# Altium PCB 51单片机24.PcbDoc
Units mil, origin at the board's own origin, x right, y up, seen from the top; angles counter-clockwise.
Board outline 5130.13 x 3948.04 mil, 2 copper layers (Top Layer, Bottom Layer); 91 components, 89 nets, 378 pads, 4 vias.
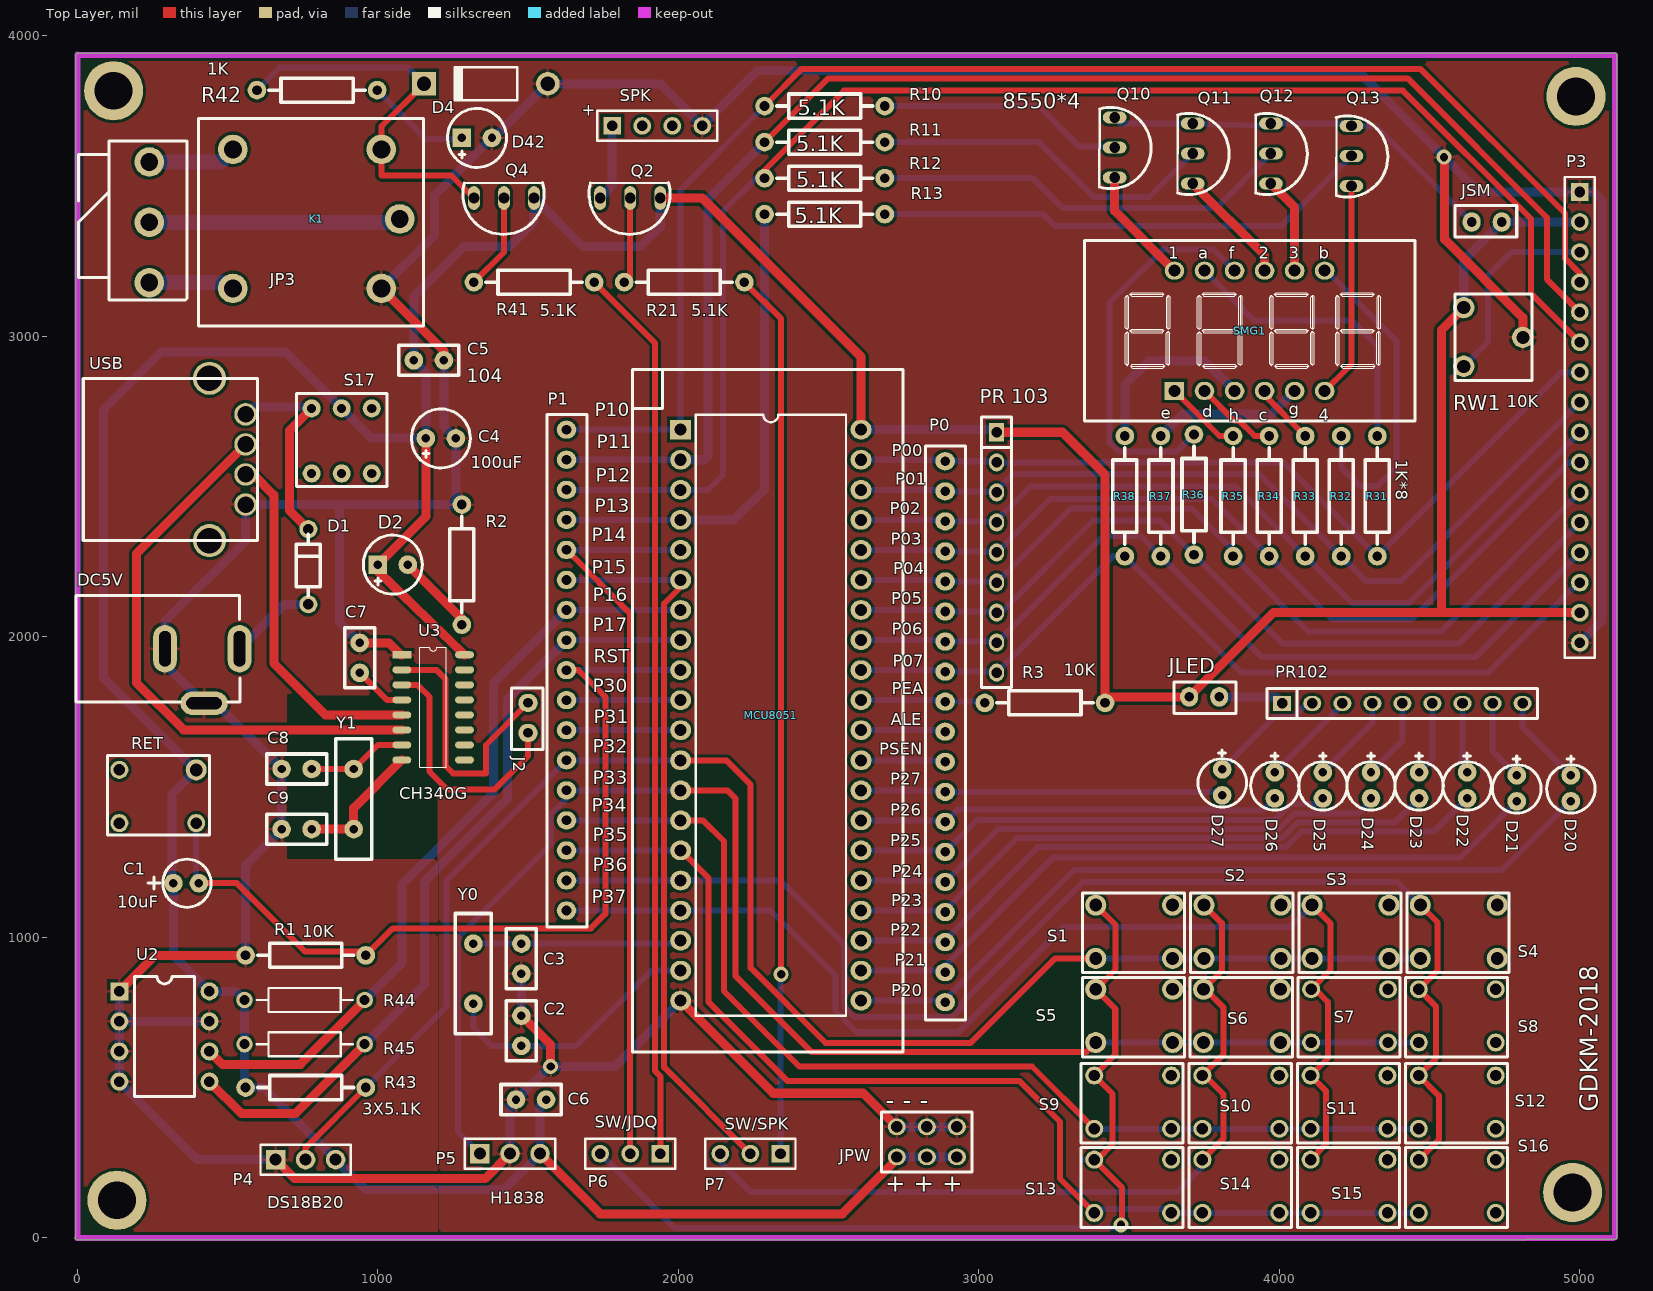
[diagram p0: Top Layer view]
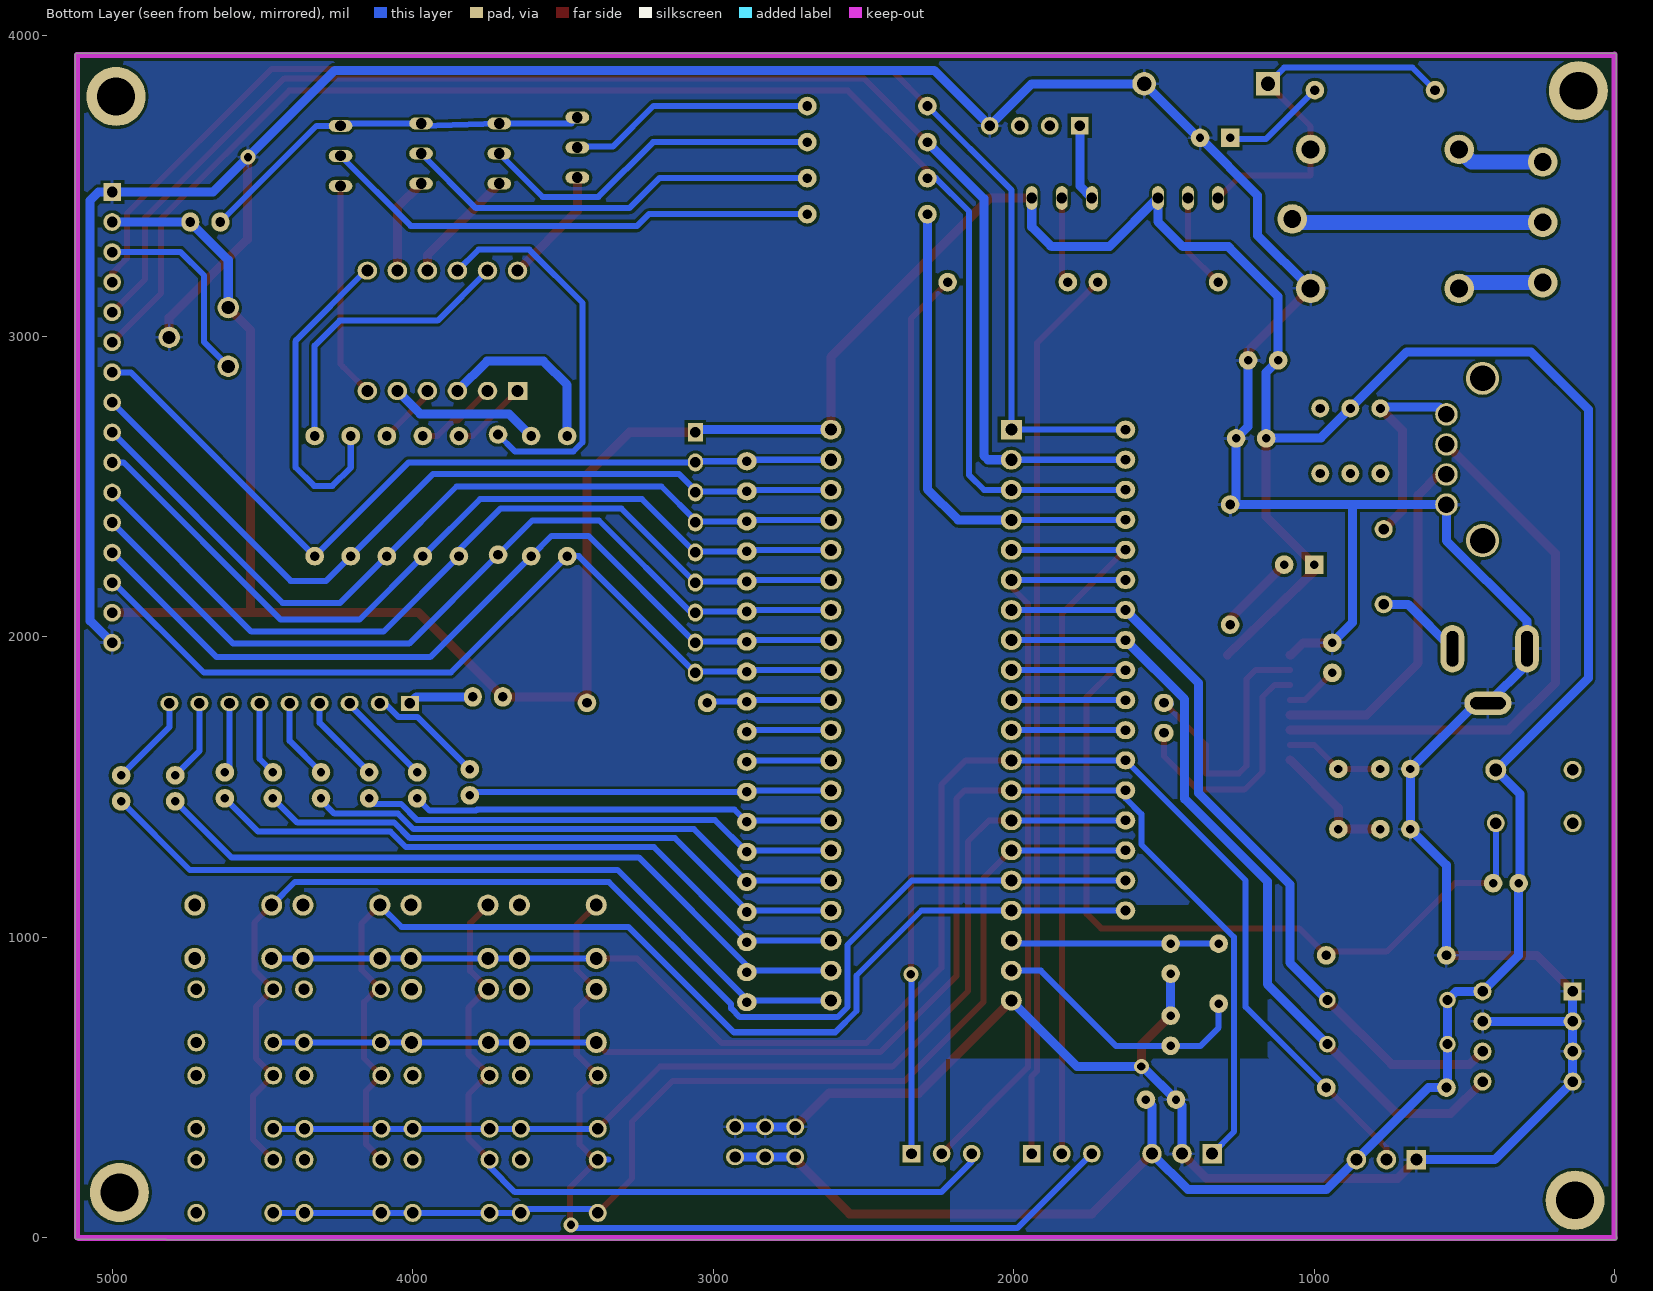
[diagram p1: Bottom Layer view, seen from below]

## Layer stack, top to bottom
Top Solder: solder mask 0.4, Solder Resist, Dk 3.5
Top Layer: signal copper 1.4
Dielectric1: dielectric 12.6, FR-4, Dk 4.8
Bottom Layer: signal copper 1.4
Bottom Solder: solder mask 0.4, Solder Resist, Dk 3.5

## Board outline
-2,-6.01 cw(c-2,-1) -5.02,3.01 -5.02,3937.01 cw(c0,3937.01) 0,3942.02 5118.11,3942.02 cw(c5118.11,3937.01) 5123.13,3937.01 5123.13,0 cw(c5118.11,0) 5118.11,-5.01 4821.01,-5.01 cw(c4818,-1) 4818,-6.01

## Design rules (kind name [scope] priority, off if disabled: settings)
Clearance [All] p1: gap=10 ignorepadtopadclearanceinfootprint=FALSE except(0: Arc-Hole Track-Hole SMDPad-Hole THPad-Hole Via-Hole Fill-Hole Poly-Hole Region-Hole Text-Hole)
FabricationTestPointUsage TestPointUsage [All] p1: valid=0 allowmultiple=FALSE
FabricationTestpoint Testpoint [All] p1: side=3 testpointundercomponent=TRUE minsize=40 maxsize=100 preferedsize=60 minholesize=0 maxholesize=40 preferedholesize=32 testpointgrid=1 allowsidetop=TRUE allowsidebottom=TRUE usegrid=TRUE gridtolerance=0.01
HoleSize [All] p1: absolutevalues=TRUE maxlimit=1000 minlimit=1 maxpercent=80.000 minpercent=20.000
PolygonConnect [All] p1: connectstyle=Relief reliefconductorwidth=10 reliefentries=4 polygonreliefangle="90 Angle" airgapwidth=10
RoutingVias PPP [InNetClass('PPP')] p1: holewidth=40 width=70 viastyle="Through Hole" minholewidth=40 minwidth=70 maxholewidth=40 maxwidth=70
RoutingVias [All] p2: holewidth=35 width=65 viastyle="Through Hole" minholewidth=35 minwidth=65 maxholewidth=35 maxwidth=65
SilkToSilkClearance [All] p1: silktosilkclearance=0
SilkToSolderMaskClearance SilkscreenOverComponentPads [IsPad] p1: minsilkscreentomaskgap=0 clearancetoexposedcopper=TRUE
SolderMaskExpansion [All] p1: expansion=4
Width power [InNetClass('power')] p1: maxlimit=30 minlimit=30 preferedwidth=30
Width JP3 [InNetClass('JP3')] p2: maxlimit=50 minlimit=50 preferedwidth=50
Width D10mil [InNetClass('D10mill')] p3: maxlimit=10 minlimit=10 preferedwidth=10
Width Width_20mil [All] p4: maxlimit=50 minlimit=20 preferedwidth=20 minimp=50.000000 maximp=50.000000 favimp=50.000000
25 further rules are at their usual default settings.

## Components (designator, comment, footprint, x,y, rotation, side; value= is the part's Value field where it differs from the comment)
C1 "10u" C2 320,1180 r0 top
C2 "Cap" RAD-0.1 1478,739 r270 top
C3 "Cap" RAD-0.1 1478,879 r90 top
C4 "100uf" C4 1160,2660 r0 top
C5 "104" RAD-0.1 1120,2920 r0 top
C6 "Cap" RAD-0.1 1460,460 r0 top
C7 "104" RAD-0.1 940,1880 r90 top
C8 "22P" RAD-0.1 780,1560 r180 top
C9 "22p" RAD-0.1 780,1360 r180 top
D1 "1N5918" 4148 760,2200 r90 top
D2 "LED0" LED2 1000,2240 r0 top
D4 "4148" DO-41 1360,3840 r180 top
D20 "LED0" LED8 4970,1539 r270 top
D21 "LED0" LED8 4790,1539 r270 top
D22 "LED0" LED8 4625,1549 r270 top
D23 "LED0" LED8 4465,1549 r270 top
D24 "LED0" LED8 4305,1549 r270 top
D25 "LED0" LED8 4145,1549 r270 top
D26 "LED0" LED8 3985,1549 r270 top
D27 "LED0" LED8 3810,1559 r270 top
D42 "LED0" LED2 1280,3660 r0 top
DC5V "POWER" DC5V-3 540,1960 r270 top
J2 "JJ" j2 1500,1780 r0 top
JLED "JJ" j2 3700,1800 r90 top
JP3 "JP3" JP3 240,3580 r270 top
JPW "JPW" SIP 2802,319 r0 top
JSM "JJ" j2 4740,3380 r270 top
K1 "JDQ" JDQ 518,3159 r0 top
MCU8051 "U1" S52 2008,2689 r0 top locked
P0 "P2" j19 2888,2584 r0 top
P1 "Header 17" J17 1628,2689 r0 top
P3 "Header 16" HDR1X16 5000,3480 r270 top
P4 "DS18B20" HDR1X3#1 660,260 r0 top
P5 "H1838" HDR1X3#1 1340,280 r0 top
P6 "SW/JDQ" HDR1X3#2 1940,280 r180 top
P7 "SW/SPK" HDR1X3#2 2340,280 r180 top
PR102 "1K" SIP-9 4010,1779 r0 top locked
"PR 103" "10K" SIP-9 3060,2680 r270 top (schematic designator PR103)
Q2 "S8550" sanjiguan 1940,3460 r90 top
Q4 "S8550" sanjiguan 1520,3460 r90 top
Q10 "S8550" sanjiguan 3452,3728 r180 top
Q11 "S8550" sanjiguan 3712,3708 r180 top
Q12 "S8550" sanjiguan 3972,3708 r180 top
Q13 "S8550" sanjiguan 4240,3700 r180 top
R1 "10K" axial0.4 560,940 r0 top
R2 "1K" axial0.4 1280,2440 r270 top
R3 "10K" axial0.4 3420,1780 r180 top
R10 "5.1K" axial0.4 2687,3766 r180 top
R11 "5.1K" axial0.4 2687,3646 r180 top
R12 "5.1K" axial0.4 2687,3526 r180 top
R13 "5.1K" axial0.4 2687,3406 r180 top
R21 "5.1K" axial0.4 2220,3180 r180 top
R31 "1K" axial0.4 4326,2268 r90 top
R32 "1K" axial0.4 4206,2268 r90 top
R33 "1K" axial0.4 4086,2268 r90 top
R34 "1K" axial0.4 3966,2268 r90 top
R35 "1K" axial0.4 3846,2268 r90 top
R36 "1K" axial0.4 3716,2273 r90 top
R37 "1K" axial0.4 3606,2268 r90 top
R38 "1K" axial0.4 3486,2268 r90 top
R41 "5.1K" axial0.4 1720,3180 r180 top
R42 "1K" axial0.4 998,3819 r180 top
R43 "5.1k" axial0.4 960,500 r180 top
R44 "5.1K" AXIAL-0.4 756.56,791.27 r180 top
R45 "5.1K" AXIAL-0.4 756.56,644.6 r180 top
RET "RET" SW#1 140,1380 r0 top
RW1 "Res Tap" RW 4840,3140 r270 top
S1 "RET" SW#2 3645,1107 r180 top
S2 "RET" SW#2 4005,1107 r180 top
S3 "RET" SW#2 4365,1107 r180 top
S4 "RET" SW#2 4725,1107 r180 top
S5 "RET" SW#2 3645,827 r180 top
S6 "RET" SW#2 4003.33,827 r180 top
S7 "GDKM-2018" SW#3 4361.67,827 r180 top
S8 "SW-PB" SW#3 4720,827 r180 top
S9 "SW-PB" SW#3 3640,540 r180 top
S10 "SW-PB" SW#3 4000,540 r180 top
S11 "SW-PB" SW#3 4360,540 r180 top
S12 "SW-PB" SW#3 4720,540 r180 top
S13 "SW-PB" SW#3 3640,260 r180 top
S14 "SW-PB" SW#3 4000,260 r180 top
S15 "SW-PB" SW#3 4360,260 r180 top
S16 "SW-PB" SW#3 4720,260 r180 top
S17 "SW-SPST" SW6 780,2760 r0 top
SMG1 "SMG" smg 3886,3048 r0 top
SPK "Speaker" HDR1X4 1780,3700 r0 top
U2 "24C04" DIP8 140,820 r0 top
U3 "CH340G-16" "SOP-16 - duplicate" 1080,1940 r0 top
USB "CON4" USB 560,2740 r90 top
Y0 "11.0592" XTAL1 1318,779 r90 top
Y1 "XTAL" XTAL1 920,1560 r270 top

## Footprints (in the part's own frame and the unit in brackets; to place one, negate y for a bottom-side part, rotate by r counter-clockwise, add the part's x,y. Pads: shape width x height; smd on the part's side, far side on the other; paste and mask are expansions set on the pad)
4148 [mil]
  round 60 hole 35: 1(-92,-9) 2(158,-9)
  silkscreen extent -63,-48 141,32
axial0.4 [mil]
  round 62 hole 32: 1(0,0) 2(400,0)
  silkscreen extent 40,-40 360,40
AXIAL-0.4 [mm] "Resistor; 2 Leads"
  round 1.4 hole 0.85: 1(-5.08,0) 2(5.08,0)
  silkscreen extent -4.06,-1.02 4.06,1.02
C2 [mil]
  round 62 hole 28: 1(0,0) 2(85,0)
  silkscreen extent -85,-80 125,80
C4 [mil]
  round 62 hole 28: 1(0,0) 2(100,0)
  silkscreen extent -48,-98 148,98
DC5V-3 [mm]
  oval 4x2 hole 1 slot 3 at 0 deg: 1(0,0) 2(0,-6.3)
  oval 2x4 hole 1 slot 3 at 90 deg: 3(4.6,-3)
  silkscreen extent -4.5,-13.8 4.5,0.04
DIP8 [mil]
  rect 60x60 hole 35: 1(0,0)
  round 60 hole 35: 2(0,-100) 3(0,-200) 4(0,-300) 5(300,-300) 6(300,-200) 7(300,-100) 8(300,0)
  silkscreen extent 50,-350 250,50
DO-41 [mm] "Diode, Axial; Body 5.2 x 2.7 mm (LxDia. max), Lead Dia. 0.86 mm (max)"
  round 2 hole 1.2: 1(-5.23,0)
  rect 2x2 hole 1.2: 2(5.23,0)
  silkscreen extent -2.65,-1.4 2.75,1.4
HDR1X3#1 [mil] "Connector; Header; 3 Position"
  rect 65x65 hole 40: 1(0,0)
  round 65 hole 40: 2(100,0) 3(200,0)
  silkscreen extent -50,-50 250,50
HDR1X3#2 [mil] "Connector; Header; 3 Position"
  rect 59.06x59.06 hole 35.43: 1(0,0)
  round 59.06 hole 35.43: 2(100,0) 3(200,0)
  silkscreen extent -50,-50 250,50
HDR1X4 [mm] "Connector; Header; 4 Position"
  rect 1.5x1.5 hole 0.9: 1(0,0)
  round 1.5 hole 0.9: 2(2.54,0) 3(5.08,0) 4(7.62,0)
  silkscreen extent -1.27,-1.27 8.89,1.27
HDR1X16 [mm] "Connector; Header; 16 Position"
  rect 1.5x1.5 hole 0.9: 1(0,0)
  round 1.5 hole 0.9: 2(2.54,0) 3(5.08,0) 4(7.62,0) 5(10.16,0) 6(12.7,0) 7(15.24,0) 8(17.78,0) 9(20.32,0) 10(22.86,0) 11(25.4,0) 12(27.94,0) 13(30.48,0) 14(33.02,0) 15(35.56,0) 16(38.1,0)
  silkscreen extent -1.27,-1.27 39.37,1.27
j2 [mil]
  oval 65x60 hole 32: 1(0,0) 2(0,-100)
  silkscreen extent -55,-155 50,50
J17 [mil]
  oval 65x60 hole 32: 1(0,0) 2(0,-100) 3(0,-200) 4(0,-300) 5(0,-400) 6(0,-500) 7(0,-600) 8(0,-700) 9(0,-800) 10(0,-900) 11(0,-1000) 12(0,-1100) 13(0,-1200) 14(0,-1300) 15(0,-1400) 16(0,-1500) 17(0,-1600)
  silkscreen extent -65,-1655 68,50
j19 [mil]
  oval 65x60 hole 32: 1(0,0) 2(0,-100) 3(0,-200) 4(0,-300) 5(0,-400) 6(0,-500) 7(0,-600) 8(0,-700) 9(0,-800) 10(0,-900) 11(0,-1000) 12(0,-1100) 13(0,-1200) 14(0,-1300) 15(0,-1400) 16(0,-1500) 17(0,-1600) 18(0,-1700) 19(0,-1800)
  silkscreen extent -65,-1860 68,50
JDQ [mm]
  round 2.5 hole 1.5: 1(0,0) 2(0,11.75) 3(12.55,11.75) 4(14.1,5.875) 5(12.55,0)
  silkscreen extent -2.92,-3.17 16.13,14.35
JP3 [mm]
  round 2.5 hole 1.5: 1(0,0) 2(5.1,0) 3(10.2,0)
  silkscreen extent -1.78,-5.97 11.68,3.18
LED2 [mil]
  rect 62x62 hole 28: 1(0,0)
  round 62 hole 28: 2(100,0)
  silkscreen extent -48,-98 148,98
LED8 [mil]
  round 62 hole 28: 1(0,0) 2(86.61,0)
  silkscreen extent -64,-81 126,81
RAD-0.1 [mil]
  round 62 hole 28: 1(0,0) 2(100,0)
  silkscreen extent -50,-50 150,50
RW [mm]
  round 1.8 hole 1.1: 1(3.65,-0.762) 2(1.143,-5.75) 3(6.096,-5.75)
  silkscreen extent 0,-6.5 7.3,0
S52 [mil]
  rect 70x65 hole 40 mask+4: 1(0,0)
  oval 70x65 hole 40 mask+4: 2(0,-100) 3(0,-200) 4(0,-300) 5(0,-400) 6(0,-500) 7(0,-600) 8(0,-700) 9(0,-800) 10(0,-900) 11(0,-1000) 12(0,-1100) 13(0,-1200) 14(0,-1300) 15(0,-1400) 16(0,-1500) 17(0,-1600) 18(0,-1700) 19(0,-1800) 20(0,-1900) 24(600,-1600) 25(600,-1500) 26(600,-1400) 27(600,-1300) 28(600,-1200) 29(600,-1100) 30(600,-1000) 31(600,-900) 32(600,-800) 33(600,-700) 34(600,-600) 35(600,-500) 36(600,-400) 37(600,-300) 38(600,-200) 39(600,-100)
  oval 70x65 hole 40: 21(600,-1900) 22(600,-1800) 23(600,-1700) 40(600,0)
  silkscreen extent -160,-2070 740,200
sanjiguan [mm]
  oval 2x1 hole 0.9: 1(0,0) 2(0,2.54) 3(0,5.08)
  silkscreen extent -3.08,-0.84 1.29,6.02
SIP [mil]
  oval 60x55 hole 38: 1(-75,50) 2(25,50) 3(125,50) 4(-75,-50) 5(25,-50) 6(125,-50)
  silkscreen extent -125,-100 175,100
SIP-9 [mil]
  rect 60x50 hole 35: 1(-0.5,-0.5)
  oval 60x50 hole 35: 2(99.5,-0.5) 3(199.5,-0.5) 4(299.5,-0.5) 5(399.5,-0.5) 6(499.5,-0.5) 7(599.5,-0.5) 8(699.5,-0.5) 9(799.5,-0.5)
  silkscreen extent -50,-50 850,50
smg [mil]
  rect 65x60 hole 40: 1(-235,-230)
  oval 65x60 hole 40: 2(-135,-230) 3(-35,-230) 4(65,-230) 5(165,-230) 6(265,-230) 7(265,170) 8(165,170) 9(65,170) 10(-35,170) 11(-135,170) 12(-235,170)
  silkscreen extent -535,-330 565,270
"SOP-16 - duplicate" [mm]
  rect 1.6x0.6 smd: 1(0,0)
  oval 1.6x0.6 smd: 2(0,-1.27) 3(0,-2.54) 4(0,-3.81) 5(0,-5.08) 6(0,-6.35) 7(0,-7.62) 8(0,-8.89) 9(5.3,-8.89) 10(5.3,-7.62) 11(5.3,-6.35) 12(5.3,-5.08) 13(5.3,-3.81) 14(5.3,-2.54) 15(5.3,-1.27) 16(5.3,0)
  silkscreen extent 1.54,-9.53 3.76,0.64
SW#1 [mil]
  round 70 hole 43: 1(255.91,177.17)
  round 60 hole 38: 2(255.91,0) 3(0,0) 4(0,177.17)
  silkscreen extent -40,-40 300,225
SW#2 [mil]
  round 70 hole 43: 1(255.9,177.17) 2(255.9,0) 3(0,0) 4(0,177.17)
  silkscreen extent -40,-40 300,225
SW#3 [mil]
  round 60 hole 38: 1(255.91,177.17) 2(255.91,0) 3(0,0) 4(0,177.17)
  silkscreen extent -40,-40 300,225
SW6 [mil]
  round 60 hole 30: 1(0,0) 2(100,0) 3(200,0) 4(200,-216.54) 5(100,-216.54) 6(0,-216.54)
  silkscreen extent -50,-260 250,50
USB [mil]
  round 75 hole 55 paste+0: 1(0,0)
  round 75 hole 55: 2(-100,0) 3(-200,0) 4(-300,0)
  round 110 hole 85: ""(-420,120) ""(120,120)
  silkscreen extent -420,-40 120,540
XTAL1 [mil]
  round 62 hole 28: 1(0,0) 2(200,0)
  silkscreen extent -100,-60 300,60

## Part data
C1 C4: library part "CAPACITOR POL", "Capacitor"
C2 C3 C6: "Capacitor"
C5: library part CAP, "Capacitor"
C7 C8 C9: library part Cap, "Capacitor"
D1: library part "Diode 1N5408", "3 Amp Medium Power Silicon Rectifier Diode"
D2 D20 D21 D22 D23 D24 D25 D26 D27 D42: "Typical INFRARED GaAs LED"
D4: library part LED0, "Typical INFRARED GaAs LED"
DC5V P4 P5 P6 P7: library part "Header 3", "Header, 3-Pin"
J2: library part J2
MCU8051: library part 89C51
P0: library part "Header 19", "Header, 19-Pin"
P1: "Header, 17-Pin"
P3: "Header, 16-Pin"
PR102: library part CON9, "Connector"
"PR 103": library part "Header 9", "Header, 9-Pin"
Q2 Q4 Q10 Q11 Q12 Q13: library part 2N3906, "PNP General Purpose Amplifier"
R1 R3 R10 R11 R12 R13 R21 R31 R32 R33 R34 R35 R36 R37 R38 R41 R42 R43: library part Res2
R2: library part RES2
R44 R45: library part Res2, "Resistor"
RET S1 S2 S3 S4 S5 S6: library part SW-PB
RW1: "Tapped Resistor"
S7: library part SW-PB, "Switch"
S8 S9 S10 S11 S12 S13 S14 S15 S16: "Switch"
S17: "Single-Pole, Single-Throw Switch"
U3: library part MAX232
USB: "Connector"
Y0: library part CRYSTAL, "Crystal"
Y1: "Crystal Oscillator"

## Free pads (board coordinates)
  round 196.85 hole 125.98: ""(121,3817) ""(132,125) ""(4976,151) ""(4987,3798)

## Via types
v1: diameter 50, hole 28, Top Layer to Bottom Layer, 4 vias

## Nets (pads, with @x,y where several pads share a name; then routed paths per layer and width w, separated by ;. In a path a pad name is that pad's centre, name@x,y a point inside that pad or via, vN(x,y) a via of type N, cw(c..) or ccw(c..) an arc to the next point about the centre after c; other vN are vias at no path point)
3V3: C7.1 U3.4 | length 177.3
  Top Layer w20: C7.1 1030,1790 U3.4
ALE: MCU8051.30 P0.10 | length 275
  Bottom Layer w20: MCU8051.30 P0.10@2883,1689
F1: P6.3 S1.2 S5.2 S9.2 S13.2 | length 3147.3
  Top Layer w20: S1.2 3455,1041.1 3455,892.9 S5.2 3454,762.1 3454,609.91 S9.2 3445,479.09 3445,311 3394,260 S13.2 3477,167.09 3477,45 3475,43 v1(3473,43)
  Bottom Layer w20: P6.3 1987.17,32.83 v1@3477.83,32.83 ; 3349,260 S13.2
F2: P7.3 S2.2 S6.2 S10.2 S14.2 | length 2753.6
  Top Layer w20: S14.2 3815,330.91 3815,477 3752,540 S10.2 3815,610.91 3815,766 3754,827 S6.2 3809,888.57 3809,1047.1 S2.2
  Bottom Layer w20: P7.3 2140,253 2241,152 3660,152 3744.09,236.09 S14.2
GND: C2.1 C3.1 C4.2 C5.2 C6.1 C7.2 C8.2 C9.2 D4.1 D42.2 DC5V.2 DC5V.3 JPW.1 JPW.2 JPW.3 K1.5 MCU8051.20 P3.1 P3.16 P4.1 P5.2 R1.1 R2.1 RW1.1 SPK.4 U2.1 U2.2 U2.3 U2.4 U2.7 U3.1 USB.4 | length 15839
  Top Layer w30: U2.1 260,940 R1.1 ; P4.1 723,197 1357.36,197 1440,279.64 P5.2 ; C7.2 1037,1980 1077,1940 U3.1 ; K1.5 1220,2951.09 C5.2 ; C2.1 1478,740 1575,643 v1(1575,570) ; MCU8051.20 2316,481 2615,481 JPW.1 ; v1(4548,3596) 4550,3594 4550,3322 4810,3062 RW1.1
  Bottom Layer w30: U2.1 U2.2 ; U2.7 U2.2 ; R1.1 560,1240 C9.2 C8.2 461.1,1778.9 DC5V.3 291.97,1908.82 DC5V.2 291.97,2051.97 560,2320 USB.4 873,2440 ; P4.1 400,260 U2.4 U2.3 U2.2 ; C7.2 873,2047 873,2440 ; K1.5 1188,3334.91 1188,3468 D42.2 1385.91,3660 D4.1 1940,3840 SPK.4 2265,3885 4259,3885 v1(4548,3596) 4664,3480 P3.1 5045.11,3480 5073,3452.11 5073,2053 P3.16 ; C5.2 1220,2700 C4.2 1260,2460 R2.1 873,2440 ; P5.2 1440,440 C6.1 1570,570 v1(1575,570) 1789,570 MCU8051.20 ; C2.1 C3.1 ; JPW.1 JPW.2 JPW.3
JDQ: P6.1 R41.1 | length 2991.1
  Top Layer w20: R41.1 1923,2977 1923,554.57 1940,537.57 P6.1
NetC2_2: C2.2 MCU8051.19 Y0.1 | length 898.4
  Bottom Layer w20: Y0.1 1318,699 1378,639 C2.2 1660,639 1910,889 MCU8051.19
NetC3_2: C3.2 MCU8051.18 Y0.2 | length 686
  Bottom Layer w20: Y0.2 C3.2 MCU8051.18@2004,979
NetC8_1: C8.1 U3.7 Y1.1 | length 333.1
  Top Layer w20: C8.1 Y1.1 1000,1640 U3.7
NetC9_1: C9.1 U3.8 Y1.2 | length 436.3
  Top Layer w30: C9.1 Y1.2 920,1430 U3.8
NetD1_1: D1.1 DC5V.1 | length 290.3
  Bottom Layer w30: DC5V.1 688,2108 D1.1
NetD2_2: D2.2 R2.2 | length 274.6
  Top Layer w30: D2.2 1280,2060 R2.2
NetD4_2: D4.2 K1.3 Q4.3 R42.2 | length 1312.3
  Top Layer w20: D4.2 1012.09,3698 1012.09,3535 1245,3535 Q4.3
  Bottom Layer w20: R42.2 673,3894 1100.09,3894 D4.2
NetD20_1: D20.1 PR102.9 | length 306
  Bottom Layer w20: PR102.9 4809.5,1699.5 D20.1
NetD21_1: D21.1 PR102.8 | length 272.8
  Bottom Layer w20: PR102.8 4709.5,1619.5 D21.1
NetD22_1: D22.1 PR102.7 | length 235.9
  Bottom Layer w20: PR102.7 4609.5,1564.5 D22.1
NetD23_1: D23.1 PR102.6 | length 247.9
  Bottom Layer w20: D23.1 4509.5,1593.5 PR102.6
NetD24_1: D24.1 PR102.5 | length 272.8
  Bottom Layer w20: D24.1 4409.5,1653.5 PR102.5
NetD25_1: D25.1 PR102.4 | length 297.6
  Bottom Layer w20: D25.1 4309.5,1713.5 PR102.4
NetD26_1: D26.1 PR102.3 | length 322.5
  Bottom Layer w20: D26.1 4209.5,1773.5 PR102.3
NetD27_1: D27.1 PR102.2 | length 390.4
  Bottom Layer w20: D27.1 3984.5,1733.5 4047.78,1733.5 4092.78,1778.5 PR102.2
NetD42_1: D42.1 R42.1 | length 350.3
  Bottom Layer w20: R42.1 1160,3657 1277,3657 D42.1
NetJLED_2: JLED.2 PR102.1 | length 218.4
  Bottom Layer w30: JLED.2 3988,1800 PR102.1
NetJP3_1: JP3.1 K1.2 | length 295.2
  Bottom Layer w50: JP3.1 476.4,3580 K1.2
NetJP3_2: JP3.2 K1.4 | length 837.7
  Top Layer w50: K1.4@1062.03,3379.21 K1.4
  Bottom Layer w50: JP3.2 K1.4@1062.03,3379.21
NetJP3_3: JP3.3 K1.1 | length 286
  Bottom Layer w50: JP3.3 498.57,3178.43 K1.1
NetJSM_2: JSM.2 Q10.1 Q11.1 Q12.1 Q13.1 | length 1333.3
  Bottom Layer w20: Q10.1 3472,3708 Q11.1 3971.69,3699.05 Q12.1@3973,3699 ; Q12.1 4232,3708 Q13.1 4320,3700 JSM.2
NetP3_3: P3.3 RW1.3 | length 673.6
  Bottom Layer w20: RW1.3 4694,2980.38 4694,3202 4772,3280 P3.3
NetQ2_2: Q2.2 R21.2 | length 288.3
  Top Layer w20: R21.2 1840,3200 Q2.2
NetQ2_3: Q2.3 SPK.1 | length 256.6
  Bottom Layer w30: Q2.3 1780,3500 SPK.1
NetQ4_2: Q4.2 R41.2 | length 321.4
  Top Layer w20: R41.2 1420,3280 Q4.2
NetQ10_2: Q10.2 R10.1 | length 822.2
  Bottom Layer w20: R10.1 3199,3766 3333,3632 3448,3632 Q10.2
NetQ10_3: Q10.3 SMG1.12 | length 392.4
  Top Layer w30: Q10.3 3452,3417 SMG1.12
NetQ11_2: Q11.2 R11.1 | length 1160
  Bottom Layer w20: R11.1 3200,3646 3382,3464 3568,3464 Q11.2
NetQ11_3: Q11.3 SMG1.9 | length 389
  Top Layer w30: Q11.3 3951,3269 SMG1.9
NetQ12_2: Q12.2 R12.1 | length 1431.5
  Top Layer w10: R12.1 R12.1@2708,3547
  Bottom Layer w20: R12.1 3179,3526 3279,3426 3790,3426 Q12.2
NetQ12_3: Q12.3 SMG1.8 | length 322.7
  Top Layer w30: Q12.3 4051,3429 SMG1.8
NetQ13_2: Q13.2 R13.1 | length 1680.2
  Bottom Layer w20: R13.1 3214,3406 3253,3367 3940,3367 ; 3954.57,3367 3940,3367 ; Q13.2 4007,3367 3940,3367
NetQ13_3: Q13.3 SMG1.6 | length 728.8
  Top Layer w20: SMG1.6 4225,2892 ; 4232,2899 4225,2892 ; Q13.3 4240,2907 4225,2892
NetR31_2: R31.2 SMG1.11 | length 979.1
  Bottom Layer w20: SMG1.11 3917,3052 4243,3052 4326,2969 R31.2
NetR32_2: R32.2 SMG1.7 | length 1096.5
  Bottom Layer w20: SMG1.7 4157,3218 4388,2987 4388,2985 4390,2983 4390,2564 4328,2502 4267,2502 4206,2563 R32.2
NetR33_2: R33.2 SMG1.4 | length 220.9
  Top Layer w20: SMG1.4 3951,2803 R33.2
  Bottom Layer w10: SMG1.4@3951,2803 SMG1.4
NetR34_2: R34.2 SMG1.2 | length 277.1
  Top Layer w20: SMG1.2 3850,2719 3867.12,2719 3918.12,2668 R34.2
NetR35_2: R35.2 SMG1.1 | length 257.1
  Top Layer w20: SMG1.1 3801,2668 R35.2
NetR36_2: R36.2 SMG1.10 | length 1334
  Bottom Layer w10: R36.2@3693,2673 R36.2 ; SMG1.10@3851,3206 SMG1.10
  Bottom Layer w20: R36.2 3660,2617 3464.88,2617 3435,2646.88 3435,3111 3612,3288 3781,3288 SMG1.10
NetR37_2: R37.2 SMG1.5 | length 507.1
  Bottom Layer w30: R37.2 3680,2742 3975,2742 SMG1.5
NetR38_2: R38.2 SMG1.3 | length 633.7
  Top Layer w10: SMG1.3@3826,2818 SMG1.3
  Bottom Layer w30: R38.2 3486,2838 3565,2917 3752,2917 SMG1.3
NetU3_5: U3.5 USB.3 | length 1184.9
  Top Layer w20: USB.3@553.93,2540 USB.3
  Top Layer w30: USB.3 585,2540 654,2471 654,1912 826,1740 U3.5
NetU3_6: U3.6 USB.2 | length 1891.4
  Top Layer w30: USB.2 197,2277 197,1847 354,1690 U3.6
P00: "PR 103.2" MCU8051.39 P0.1 P3.7 R31.1 | length 2778.5
  Bottom Layer w20: MCU8051.39 2883,2589 P0.1 3056,2584 3059.5,2580.5 4013.5,2580.5 R31.1 4938,2880 P3.7
P01: "PR 103.3" MCU8051.38 P0.2 P3.8 R32.1 | length 2809.5
  Bottom Layer w20: MCU8051.38 P0.2@2888,2489 ; P0.2 3056,2484 3114,2542 3932,2542 R32.1 4288,2186 4406,2186 P3.8
P02: "PR 103.4" MCU8051.37 P0.3 P3.9 R33.1 | length 2835.2
  Bottom Layer w20: MCU8051.37 P0.3@2888,2389 ; P0.3 3056,2384 3172,2500 3854,2500 R33.1 4241,2113 4433,2113 P3.9
P03: "PR 103.5" MCU8051.36 P0.4 P3.10 R34.1 | length 2849.7
  Bottom Layer w20: MCU8051.36 P0.4@2888,2289 ; P0.4 3056,2284 3059.5,2280.5 3237,2458 3776,2458 R34.1 4177,2057 4439,2057 4962,2580 P3.10
P04: "PR 103.6" MCU8051.35 P0.5 P3.11 R35.1 | length 2863.1
  Bottom Layer w20: MCU8051.35 P0.5@2888,2189 ; P0.5 3056,2184 ; 3059.5,2180.5 3305,2426 3708,2426 3846,2288 R35.1 4097,2017 4537,2017 P3.11
P05: "PR 103.7" MCU8051.34 P0.6 P3.12 R36.1 | length 2857.2
  Bottom Layer w20: MCU8051.34 P0.6@2888,2089 ; P0.6 3056,2084 3059.5,2080.5 3073.5,2080.5 3380,2387 3602,2387 R36.1 4012,1977 4597,1977 P3.12
P06: "PR 103.8" MCU8051.33 P0.7 P3.13 R37.1 | length 2852.2
  Bottom Layer w20: MCU8051.33 P0.7@2888,1989 ; P0.7 3056,1984 3059.5,1980.5 3415,2336 3538,2336 R37.1 3942,1932 4652,1932 P3.13
P07: "PR 103.9" MCU8051.32 P0.8 P3.14 R38.1 | length 2838.1
  Bottom Layer w20: MCU8051.32 P0.8@2888,1889 ; P0.8 3056,1884 3059.5,1880.5 3447,2268 R38.1 3873,1881 4695,1881 4994,2180 P3.14
P10: MCU8051.1 P1.1 P3.4 R10.2 | length 4736.2
  Top Layer w20: R10.2 2411,3890 4469.52,3890 4950.47,3409.05 4950.47,3259.48 5000,3209.96 P3.4
  Bottom Layer w20: P1.1 MCU8051.1 2008,3487 R10.2
P11: MCU8051.2 P1.2 P3.5 R11.2 | length 4840.8
  Top Layer w20: R11.2 2499,3858 4427,3858 4890,3395 4890,3190 P3.5
  Bottom Layer w20: P1.2 MCU8051.2
  Bottom Layer w30: MCU8051.2 2085,2589 2099,2603 2099,3458 R11.2
P12: MCU8051.3 P1.3 P3.6 R12.2 | length 4917.5
  Top Layer w20: R12.2 2287,3552 2552,3817 4411,3817 4838,3390 4838,3142 P3.6
  Bottom Layer w20: P1.3 MCU8051.3 ; MCU8051.3@2033.75,2489 2034.02,2488.73 2098.73,2488.73 2148,2538 2148,3415 2259,3526 R12.2
P13: MCU8051.4 P1.4 R13.2 | length 1616.5
  Bottom Layer w20: P1.4 MCU8051.4
  Bottom Layer w30: MCU8051.4 2008.25,2388.75 2184.75,2388.75 2287,2491 R13.2
P14: MCU8051.5 P1.5 P6.2 | length 2476.8
  Top Layer w20: P1.5 1840,2077 P6.2
  Bottom Layer w20: P1.5 MCU8051.5
P15: MCU8051.6 P1.6 P7.2 | length 2430.7
  Top Layer w20: MCU8051.6 2008,2165.75 1953,2110.75 1953,567 P7.2
  Bottom Layer w20: P1.6 MCU8051.6
P16: MCU8051.7 P1.7 R44.1 U2.6 | length 2579
  Top Layer w30: U2.6 483,577 742.29,577 R44.1
  Bottom Layer w20: P1.7 MCU8051.7
  Bottom Layer w30: R44.1 1081.29,916 1081.29,1176.29 1385,1480 1385,1846 P1.7
P17: MCU8051.8 P1.8 R45.1 U2.5 | length 2659.3
  Top Layer w30: U2.5 547,413 724.96,413 R45.1
  Bottom Layer w20: P1.8 MCU8051.8
  Bottom Layer w30: R45.1 1156,844.04 1156,1186 1431,1461 1431,1792 P1.8
P20: D20.2 MCU8051.21 P0.19 | length 2643.9
  Bottom Layer w20: MCU8051.21 P0.19@2883,789 ; P0.19 P0.19@2883,789 ; D20.2 4741.61,1224 3318,1224 P0.19@2883,789
P21: D21.2 MCU8051.22 P0.18 | length 2434.3
  Bottom Layer w20: MCU8051.22 P0.18@2883,889 ; P0.18@2897,884 P0.18 2888,906 3248,1266 4603.61,1266 D21.2
P22: D22.2 MCU8051.23 P0.17 | length 2220.7
  Bottom Layer w20: MCU8051.23 P0.17@2883,989 ; P0.17 P0.17@2883,989 ; D22.2 4514,1351.39 4099.02,1351.39 4098.41,1352 4074.02,1352 4022.02,1300 3197,1300 2886,989 P0.17@2883,989
P23: D23.2 MCU8051.24 P0.16 | length 2029.2
  Bottom Layer w20: MCU8051.24 P0.16@2886,1089 ; P0.16@2903,1089 P0.16@2886,1089 ; D23.2 4384,1381.39 4111.45,1381.39 4110.83,1382 4061.59,1382 4009.59,1330 3127,1330 P0.16@2886,1089
P24: D24.2 MCU8051.25 P0.15 | length 1811.6
  Bottom Layer w20: MCU8051.25 P0.15@2883,1189 ; P0.15 3064,1360 3997.17,1360 4049.17,1412 4123.26,1412 4123.88,1411.39 4260.39,1411.39 4305,1456 D24.2
P25: D25.2 MCU8051.26 P0.14 | length 1613
  Bottom Layer w20: MCU8051.26 2883,1289 P0.14 2994,1390 3984.74,1390 4038.74,1444 4126.61,1444 D25.2
P26: D26.2 MCU8051.27 P0.13 | length 1414.5
  Bottom Layer w20: MCU8051.27 2883,1389 P0.13 2929,1425 3785.26,1425 3788.88,1421.39 3944,1421.39 D26.2
P27: D27.2 MCU8051.28 P0.12 | length 1208.9
  Bottom Layer w20: MCU8051.28 2883,1489 P0.12 2889,1483 3799.39,1483 D27.2
P30: MCU8051.10 P1.10 | length 380
  Bottom Layer w20: P1.10 MCU8051.10
P30R: J2.1 U3.2 | length 889
  Top Layer w20: U3.2 1195,1890 1226,1859 1226,1570 1251,1545 1360,1545 1360,1640 J2.1 J2.1@1500,1781
  Bottom Layer w20: J2.1@1476,1777 J2.1@1478,1779
P31: MCU8051.11 P1.11 | length 380
  Bottom Layer w20: P1.11 MCU8051.11
P31T: J2.2 U3.3 | length 852.8
  Top Layer w20: U3.3 1132,1840 1172,1800 1172,1551 1232,1491 1388,1491 1500,1603 J2.2 J2.2@1500,1699
P32: MCU8051.12 P1.12 P4.2 R43.1 S1.1 S1.4 S2.1 S2.4 S3.1 S3.4 S4.1 | length 5392.6
  Top Layer w20: P4.2 760,300 R43.1 ; MCU8051.12 2160,1589 2241,1508 2241,898 2490,649 2973,649 3253.83,929.83 S1.1
  Bottom Layer w20: R43.1 1228,768 1228,1189 P1.12 MCU8051.12 ; S1.1 S1.4 S2.1 S2.4 S3.1 S3.4 S4.1
P33: MCU8051.13 P1.13 P5.1 S5.1 S5.4 S6.1 S6.4 S7.1 S7.4 S8.1 | length 4943.6
  Top Layer w20: MCU8051.13 2163,1489 2190,1462 2190,872 2443,619 3358.26,619 S5.1
  Bottom Layer w20: P5.1 1267,353 1267,1000.12 1575.5,1308.62 1575.5,1409.71 1628,1462.21 P1.13 MCU8051.13 ; S5.1 S5.4 S6.1 S6.4 S7.1 S7.4 S8.1
P34: MCU8051.14 P1.14 S9.1 S9.4 S10.1 S10.4 S11.1 S11.4 S12.1 | length 3552.9
  Top Layer w20: MCU8051.14 2082,1389 2152,1319 2152,821 2403,570 3176.93,570 S9.1
  Bottom Layer w20: P1.14 MCU8051.14 ; S9.1 S9.4 S10.1 S10.4 S11.1 S11.4 S12.1
P35: MCU8051.15 P1.15 S13.1 S13.4 S14.1 S14.4 S15.1 S15.4 S16.1 | length 3698.7
  Top Layer w20: MCU8051.15 2101,1196 2101,784 2363,522 3134,522 3270,386 3270,196.93 S13.1
  Bottom Layer w20: P1.15 MCU8051.15 ; S13.1 3397.26,96 3626.83,96 S13.4 S14.1 S14.4 S15.1 S15.4 S16.1
P36: MCU8051.16 P1.16 S4.2 S8.2 S12.2 S16.2 | length 4378.3
  Top Layer w20: S16.2 4531,326.91 4531,473.09 S12.2 4522,597.91 4522,769.09 S8.2 4527,889.91 4527,1049.1 S4.2
  Bottom Layer w20: P1.16 2339,1189 2553,975 2553,767.25 2586.25,734 2911.21,734 2940.5,763.29 2940.5,777.5 3347,1184 4392.1,1184 S4.2
P37: MCU8051.17 P1.17 S3.2 S7.2 S11.2 S15.2 | length 3892.2
  Top Layer w20: S15.2 4155.09,311 4155.09,489 S11.2 4162,597.91 4162,784 4119,827 S7.2 4170,891.24 4170,1046.1 S3.2
  Bottom Layer w20: P1.17@1630,1087 P1.17 MCU8051.17 2307,1089 2523,873 2523,754.83 2593.83,684 2931,684 3282,1035 4037.1,1035 S3.2
PEA: MCU8051.31 P0.9 R3.2 | length 415.7
  Bottom Layer w20: MCU8051.31 2883,1789 P0.9 3016,1784 R3.2
PSEN: MCU8051.29 P0.11 | length 275
  Bottom Layer w20: MCU8051.29 P0.11@2883,1589
RST: C1.2 MCU8051.9 P1.9 R1.2 RET.2 | length 2980.2
  Top Layer w20: C1.2 531,1180 759,952 948,952 R1.2 1050,1030 1709,1030 1757,1078 1757,1800 1668,1889 P1.9
  Bottom Layer w20: RET.2 395.91,1189.09 C1.2 ; P1.9 MCU8051.9
SPK: P7.1 R21.1 | length 2957.5
  Top Layer w20: R21.1 2342,3058 v1(2342,877)
  Bottom Layer w20: P7.1 v1@2340,884
VCC: "PR 103.1" C1.1 C4.1 C5.1 C6.2 D2.1 JLED.1 JPW.4 JPW.5 JPW.6 JSM.1 MCU8051.40 P3.2 P3.15 P4.3 P5.3 Q2.1 Q4.1 R3.1 R43.2 R44.2 R45.2 RET.1 RW1.2 S17.2 U2.8 U3.16 | length 15445.8
  Top Layer w30: D2.1@1000,2239 1000.34,2218.74 U3.16 ; D2.1 1160,2400 C4.1 ; P5.3 1740,80 2546,80 2727,261 JPW.4 ; Q2.1 2079,3460 2608,2931 MCU8051.40 ; 3059.5,2680.5 3278.5,2680.5 3420,2539 R3.1 3440,1800 JLED.1 3980,2080 4540,2080 ; RW1.2 4540,3021.38 4540,2080 ; P3.15 4540,2080
  Bottom Layer w30: 1281,3293 1120,3132 C5.1 1160,2880 C4.1 1158,2662 978,2662 S17.2 692,2948 279,2948 88,2757 88,1862 392.83,1557.17 RET.1 315,1476.26 315,1185 C1.1 320,940 U2.8 527.83,820 R44.2 R45.2 556.56,503.44 R43.2 620,500 P4.3 960,160 1420,160 P5.3 1540,440 C6.2 ; 1286,3298 1437,3298 1520,3381 Q4.1 1682,3298 1873,3298 1876,3301 1877,3301 1940,3364 Q2.1 ; MCU8051.40 3051,2689 3059.5,2680.5 ; JPW.4 JPW.5 JPW.6 ; RW1.2 4613.62,3253.62 JSM.1 P3.2
VSUB: D1.2 S17.1 USB.1 | length 689.5
  Top Layer w30: D1.2 707,2420 707,2687 S17.1
  Bottom Layer w30: USB.1 584,2764 776,2764 S17.1
pads on no net: RET.3 RET.4 S1.3 S2.3 S3.3 S4.3 S4.4 S5.3 S6.3 S7.3 S8.3 S8.4 S9.3 S10.3 S11.3 S12.3 S12.4 S13.3 S14.3 S15.3 S16.3 S16.4 S17.3 S17.4 S17.5 S17.6 SPK.2 SPK.3 U3.9 U3.10 U3.11 U3.12 U3.13 U3.14 U3.15 USB.

## Polygon pours and split planes (outlines as drawn)
GND on Top Layer "Bottom Layer-No Net" (solid, remove dead copper, pour order 0): 3,3939 5108,3939 5115,3946 5115,8 1192,8 1199,15 1199,1805 703,1805 697,1811 697,1260 1189,1260 1194,1255 1203,1246 1203,-10 -4,-10 -4,3938
GND on Bottom Layer "Bottom Layer-No Net" (solid, remove dead copper, pour order 2): 3,3932 10,3939 5093,3939 5093,22 5086,15 5079,8 2211,8 2211,1072 2167,1116 2159,1108 1155,1108 1155,602 1148,595 2226,595 2226,38 2218,30 2196,8 18,8 18,3924 3,3939

## Keep-outs
Keep-Out Layer:
  lines w10: -2,-1 4818,-1 ; 0,0 5118.11,0 5118.11,3937.01 0,3937.01 0,0
  lines w20: 1,-1 5107.34,-1 ccw(c5107.34,12.66) 5117,3 5117,3936 3.41,3936 cw(c3.41,3939.41) 1,3937 1,2.41 ccw(c4.41,2.41) 2,0

## Silkscreen, mask and mechanical layers (free items; w line width, h text height)
Top Overlay:
  text "1K" at 432,3870 h40
  text "8550*4" at 3080,3757 h51.18
  text "5.1K" at 2397,3736 h51.18
  text "+" at 1679,3733 h40
  text "5.1K" at 2392,3616 h51.18
  text "5.1K" at 2392,3496 h51.18
  text "5.1K" at 2387,3376 h51.18
  text "5.1K" at 1539,3067 h40
  text "5.1K" at 2043,3067 h40
  text "104" at 1296,2847 h45
  text "10K" at 4757,2764 h40
  text "P10" at 1722,2734 h45
  text "P11" at 1729,2628 h45
  text "P00" at 2710,2600 h40
  text "1K*8" at 4388,2589 h40 r270
  text "100uF" at 1309,2561 h40
  text "P12" at 1726,2516 h45
  text "P01" at 2722,2506 h40
  text "P13" at 1722,2414 h45
  text "P02" at 2704,2408 h40
  text "P14" at 1712,2318 h45
  text "P03" at 2707,2306 h40
  text "P15" at 1712,2209 h45
  text "P04" at 2716,2208 h40
  text "P16" at 1715,2118 h45
  text "P05" at 2708,2108 h40
  text "P17" at 1715,2019 h45
  text "P06" at 2711,2006 h40
  text "RST" at 1719,1914 h45
  text "P07" at 2713,1900 h40
  text "10K" at 3283,1870 h40
  text "P30" at 1715,1815 h45
  text "PEA" at 2710,1808 h40
  text "P31" at 1719,1713 h45
  text "ALE" at 2707,1706 h40
  text "P32" at 1715,1614 h45
  text "PSEN" at 2669,1608 h40
  text "P33" at 1715,1509 h45
  text "P27" at 2706,1507 h40
  text "CH340G" at 1071,1459 h40
  text "P34" at 1712,1417 h45
  text "P26" at 2705,1405 h40
  text "P35" at 1715,1319 h45
  text "P25" at 2705,1303 h40
  text "P36" at 1715,1220 h45
  text "P24" at 2711,1200 h40
  text "P37" at 1712,1114 h45
  text "P23" at 2708,1103 h40
  text "10uF" at 133,1099 h40
  text "P22" at 2705,1005 h40
  text "10K" at 748,1000 h40
  text "P21" at 2720,906 h40
  text "P20" at 2709,803 h40
  text "- - -" at 2691,430 h59.06
  text "3X5.1K" at 949,410 h40
  text "SW/JDQ" at 1722,366 h40
  text "SW/SPK" at 2154,360 h40
  text "+ + +" at 2689,154 h59.06
  text "H1838" at 1375,113 h40
  text "DS18B20" at 632,99 h40

## Text inside footprints (layer, text, board x,y; h text height)
SMG1: Top Overlay "1" at 3631,3258 h40; Top Overlay "a" at 3731,3258 h40; Top Overlay "f" at 3831,3258 h40; Top Overlay "2" at 3931,3258 h40; Top Overlay "3" at 4031,3258 h40; Top Overlay "b" at 4131,3258 h40; Top Overlay "4" at 4131,2718 h40; Top Overlay "g" at 4031,2738 h40; Top Overlay "c" at 3931,2718 h40; Top Overlay "h" at 3831,2718 h40; Top Overlay "d" at 3743,2731 h40; Top Overlay "e" at 3606,2726 h40